# EAGLE board tx35-pnl (EAGLE 6.6.0)
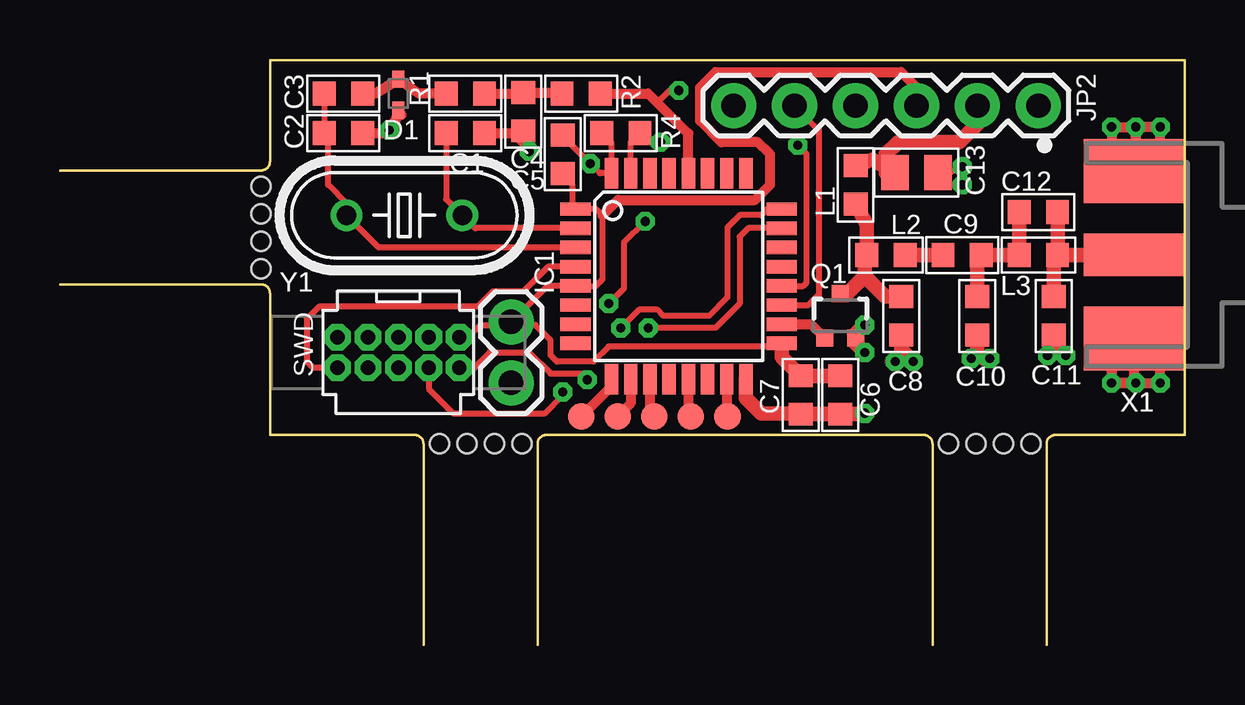
[diagram p0: board, top side]
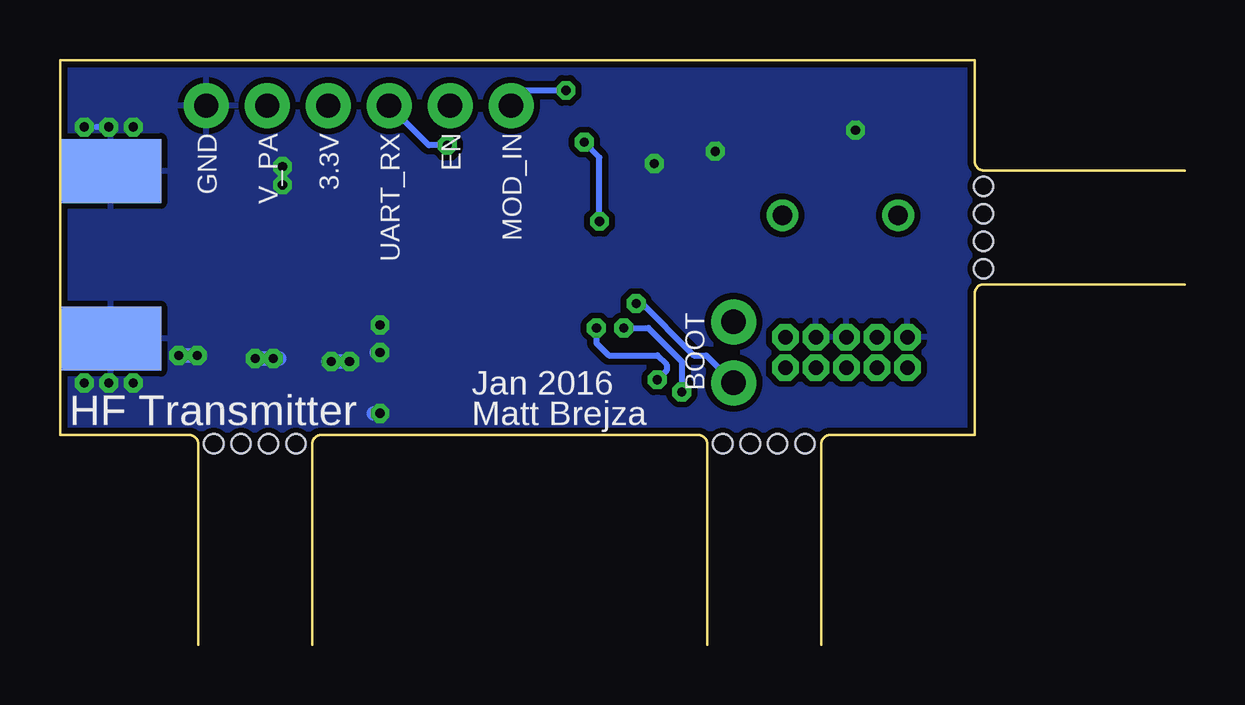
[diagram p1: board, bottom side, seen from below]

Size 46.86 x 24.38 mm. Coordinates in mm from the lower left corner, seen from the top.
Outline: 0,15.03 8.38,15.03 arc-90 8.75,14.65 8.75,8.75 14.77,8.75 arc-90 15.15,8.38 15.15,0
Outline: 0,19.78 8.38,19.78 arc90 8.75,20.15 8.75,24.38 46.86,24.38 46.86,8.75 41.48,8.75 arc90 41.11,8.38 41.11,0
Outline: 19.9,0 19.9,8.38 arc-90 20.27,8.75 35.98,8.75 arc-90 36.36,8.38 36.36,0
Copper layers (1*16): Top 0.035mm / dielectric 1.5mm / Bottom 0.035mm
Design rules "default *": minimum track width 10mil, minimum drill 14mil, track to track 8mil, track to pad 8mil, pad to pad 6mil, via to via 8mil, smd to smd 8mil, copper to edge 10mil, drill to drill 8mil, minimum pad ring 10mil, minimum via ring 8mil, stop-mask expansion 4mil, vias tented up to drill 16mil, thermal gap 10mil
Holes 0.8 mm at 8.38,19.11 8.38,17.96 8.38,16.82 8.38,15.68 15.82,8.38 16.96,8.38 18.1,8.38 19.25,8.38 37.03,8.38 38.17,8.38 39.31,8.38 40.46,8.38

## Footprints (pad centres in the part's own frame; a part is rotated, then mirrored left to right if it is on the bottom)
C0603-N = smd 0.95 x 1: 1 -0.8,0; 2 0.8,0
C0805-N = smd 1.15 x 1.45: 1 -0.9,0; 2 0.9,0
SOD523 = smd 0.7 x 0.5: A 0.7,0; C -0.6,0
TQFP32-08 = smd 1.27 x 0.559: 1 -4.293,2.8; 2 -4.293,2; 3 -4.293,1.2; 4 -4.293,0.4; 5 -4.293,-0.4; 6 -4.293,-1.2; 7 -4.293,-2; 8 -4.293,-2.8; 17 4.293,-2.8; 18 4.293,-2; 19 4.293,-1.2; 20 4.293,-0.4; 21 4.293,0.4; 22 4.293,1.2; 23 4.293,2; 24 4.293,2.8 | smd 0.559 x 1.27: 9 -2.8,-4.293; 10 -2,-4.293; 11 -1.2,-4.293; 12 -0.4,-4.293; 13 0.4,-4.293; 14 1.2,-4.293; 15 2,-4.293; 16 2.8,-4.293; 25 2.8,4.293; 26 2,4.293; 27 1.2,4.293; 28 0.4,4.293; 29 -0.4,4.293; 30 -1.2,4.293; 31 -2,4.293; 32 -2.8,4.293
SWD_PTH_SHROUD = drill 0.6 octagon: 1 -2.54,-0.635; 2 -2.54,0.635; 3 -1.27,-0.635; 4 -1.27,0.635; 5 0,-0.635; 6 0,0.635; 7 1.27,-0.635; 8 1.27,0.635; 9 2.54,-0.635; 10 2.54,0.635
1X02 = drill 1.016 pad 1.88: 1 0,0; 2 2.54,0
1X06 = drill 1.016 pad 1.88: 1 0,0; 2 2.54,0; 3 5.08,0; 4 7.62,0; 5 10.16,0; 6 12.7,0
L0603-N = smd 0.95 x 1: 1 -0.8,0; 2 0.8,0
SOT323 = smd 0.7 x 0.7: 1 -0.65,-0.925; 2 0.65,-0.925; 3 0,0.925
R0603-N = smd 0.95 x 1: 1 -0.8,0; 2 0.8,0
TP11R = smd 1.1 x 1.1: TP 0,0
J502-ND-142-0711-821/826 = smd 4.191 x 1.778: 1 2.115,0 | smd 4.191 x 2.667: G@1 2.115,3.495; G@2 2.115,-3.495 | smd 4.191 x 2.667 bottom: G@3 2.115,3.495; G@4 2.115,-3.495
HC49U-V = drill 0.813: 1 -2.413,0; 2 2.413,0

## Placement (x,y rotation side)
C1  18p  [C0603-N]  16.89,21.34 0 top
C2  12p  [C0603-N]  11.81,21.34 0 top
C3  12p  [C0603-N]  11.81,22.99 0 top
C4  560p  [C0603-N]  19.3,22.22 90 top
C5  100n  [C0603-N]  20.95,20.45 270 top
C6  4u7  [C0603-N]  32.51,10.41 90 top
C7  100n  [C0603-N]  30.86,10.41 90 top
C8  [C0603-N]  35.05,13.71 90 top
C9  [C0603-N]  37.59,16.25 180 top
C10  [C0603-N]  38.23,13.71 270 top
C11  [C0603-N]  41.4,13.71 270 top
C12  [C0603-N]  40.77,18.03 0 top
C13  [C0805-N]  35.69,19.68 0 top
D1  [SOD523]  14.1,22.99 270 top
IC1  STM32F030K6  [TQFP32-08]  25.78,15.37 0 top
J1  SWD_SHROUD  [SWD_PTH_SHROUD]  14.1,12.19 180 top
JP1  [1X02]  18.79,10.92 90 top
JP2  [1X06]  40.77,22.48 180 top
L1  [L0603-N]  33.15,19.18 90 top
L2  [L0603-N]  34.42,16.25 0 top
L3  [L0603-N]  40.77,16.25 0 top
Q1  MOSFET-NCHANNEL2N7002PW  [SOT323]  32.51,13.71 0 top
R1  2.2M  [R0603-N]  16.89,22.99 180 top
R2  220k  [R0603-N]  21.72,22.99 180 top
R4  10k  [R0603-N]  23.37,21.34 180 top
TP1  PTR1TP11R  [TP11R]  27.81,9.52 0 top
TP2  PTR1TP11R  [TP11R]  21.72,9.52 0 top
TP3  PTR1TP11R  [TP11R]  26.29,9.52 0 top
TP5  PTR1TP11R  [TP11R]  24.76,9.52 0 top
TP6  PTR1TP11R  [TP11R]  23.24,9.52 0 top
X1  SMA-142-0711-821/826  [J502-ND-142-0711-821/826]  46.86,16.25 180 top
Y1  [HC49U-V]  14.35,17.91 0 top

## Library data of the parts
C1-C13 L1-L3 R1 R2 R4 = passives-7351
D1 = diode
IC1 JP1 = Mine
J1 = dtb
JP2 = SparkFun-Connectors; PROD_ID: CONN-08437
Q1 = SparkFun-DiscreteSemi; PROD_ID: TRANS-11151
TP1-TP3 TP5 TP6 = testpad
X1 = con-coax; MF: JOHNSON COMPONENTS; MPN: 142-0711-821; OC_FARNELL: 1019328; OC_NEWARK: 16F3627
Y1 = SparkFun-FreqCtrl

## Nets
+3V3: C5.2 C6.2 C7.2 IC1.1 IC1.5 IC1.17 J1.1 JP1.2 JP2.3
GND: C1.2 C2.2 C4.1 C5.1 C6.1 C7.1 C8.1 C10.2 C11.2 C13.2 D1.A IC1.16 IC1.32 J1.3 J1.5 J1.9 JP2.1 Q1.2 R4.2 X1.G@1 X1.G@2 X1.G@3 X1.G@4
MCO: IC1.18 Q1.1
N$1: C2.1 C3.1 IC1.3 Y1.1
N$2: C1.1 IC1.2 Y1.2
N$3: C3.2 D1.C R1.2
N$4: C4.2 R1.1 R2.2
N$5: IC1.28 JP2.6 R2.1
N$6: C11.1 C12.2 L3.2 X1.1
N$7: C13.1 JP2.2 L1.2
N$8: C9.1 C10.1 C12.1 L3.1
N$9: IC1.20 JP2.4
N$10: C9.2 L2.2
N$11: C8.2 L1.1 L2.1 Q1.3
N$12: IC1.19 JP2.5
N$13: IC1.31 JP1.1 R4.1
N$14: IC1.9 TP2.TP
N$15: IC1.15 TP1.TP
N$16: IC1.13 TP3.TP
N$18: IC1.11 TP5.TP
N$19: IC1.10 TP6.TP
NRST: IC1.4 J1.10
SWDCLK: IC1.24 J1.4
SWDIO: IC1.23 J1.2

## Tracks (layer width: path | path; a pad name or v marks a point on that pad's centre or on a via)
+3V3
  Top 0.254: C5.2 20.86,19.65 21.33,19.18 21.33,18.32 IC1.1 22.35,18.16 22.61,17.91 22.61,15.24 22.33,14.97 IC1.5 20.3,14.97 JP1.2 | IC1.17 29.84,12.57 29.72,12.45 22.86,12.45 22.22,11.81 20.7,11.81 20.45,12.06 20.45,12.7 19.81,13.33 18.92,13.33 JP1.2 | J1.1 17.02,12.83 17.52,13.33 18.67,13.33 JP1.2
  Top 0.406: 22.61,17.91 23.24,18.54 28.95,18.54 29.59,19.18 29.59,20.45 29.08,20.95 27.56,20.95 26.67,21.84 26.67,23.24 27.3,23.88 35.05,23.88 35.69,23.24 JP2.3
  Top 0.61: IC1.17 30.07,12 C7.2 C6.2
GND  (via drill 0.38)
  Top 0.254: D1.A 14.22,22.1 | 19.05,21.08 v19.56,20.57 19.3,20.83 C4.1 | C5.1 20.95,21.21 v22.1,20.07 22.5,19.66 IC1.32 22.98,20.92 R4.2 | X1.G@4 44.75,21.51 v44.83,21.59 | C13.2 37.08,19.68 v37.59,19.94 | v37.59,19.18 37.08,19.18 36.7,19.56
  Top 0.406: C2.2 13.84,21.34 v13.72,21.46 14.1,22.1 14.22,22.1 | C1.2 19.21,21.34 C4.1 | v43.81,10.92 v44.83,10.92 44.75,11 X1.G@1 43.81,11.83 v43.81,10.92 | v43.81,10.92 v45.85,10.92 45.85,11.94 44.07,11.94 43.81,11.68 v43.81,10.92 | 44.83,20.7 43.81,20.7 v43.81,21.59 v44.83,21.59 | 44.83,20.7 45.85,20.7 v45.85,21.59 v44.83,21.59 | v44.83,21.59 44.83,20.7
  Top 0.61: C10.2 38.23,12.06 38.1,12.06 v37.97,11.94 | v38.73,11.94 38.48,11.94 | C11.2 41.4,12.32 v41.15,12.06 | v41.91,12.06 41.78,12.06 | C8.1 35.05,12.32 v35.56,11.81 | v34.8,11.81 34.67,11.81 | v33.53,12.19 33.16,12.56 Q1.2 33.16,12.97 v33.53,13.33 | IC1.16 28.58,10.28 29.21,9.65 30.82,9.65 C7.1 C6.1 33.49,9.61 v33.53,9.65
  Bottom 0.254: v13.72,21.46 13.97,21.59 13.84,21.72 | v19.56,20.57 19.68,20.57 | v22.1,20.07 22.1,19.81 | v44.83,21.59 45.34,21.59 | v37.59,19.94 v37.59,19.18
  Bottom 0.61: 37.72,11.94 v37.97,11.94 v38.73,11.94 | 41.02,12.06 v41.15,12.06 v41.91,12.06 | 35.69,11.81 v35.56,11.81 v34.8,11.81 | v33.53,12.19 33.65,12.19 | v33.53,9.65 33.78,9.65
  pour Bottom (isolate 0.254): 8.64,25.02 48.26,25.02 48.51,24.76 48.51,8.38 48.13,8 8.51,8 8.13,8.38 8.13,24.38 8.25,24.51
MCO
  Top 0.406: IC1.18 31.29,13.37 Q1.1
N$1
  Top 0.254: IC1.3 13.28,16.57 Y1.1 11.94,18.41 11.18,19.18 11.18,20.92 C2.1 C3.1
N$2
  Top 0.254: IC1.2 17.3,17.37 Y1.2 16.09,18.58 C1.1
N$3
  Top 0.406: R1.2 14.95,22.99 D1.C 13.12,22.99 C3.2
N$4
  Top 0.406: R1.1 19.27,22.99 C4.2 20.88,23.02 R2.2
N$5  (via drill 0.38)
  Top 0.254: v25.78,23.11 25.4,23.11 24.89,22.61
  Top 0.406: R2.1 24.51,22.99 24.89,22.61 26.18,21.32 IC1.28
  Bottom 0.254: JP2.6 28.07,22.73 27.68,23.11 v25.78,23.11
N$6
  Top 0.61: C12.2 L3.2 | X1.1 L3.2 | C11.1 41.4,16.09 L3.2
N$7
  Top 0.61: L1.2 33.86,20.23 C13.1 34.42,19.7 34.42,20.45 34.92,20.95 37.46,20.95 38.23,21.72 JP2.2
N$8
  Top 0.61: C12.1 L3.1 C9.1 38.23,16.09 C10.1
N$9  (via drill 0.38)
  Top 0.254: IC1.20 30.97,14.97 31.11,15.11 31.11,20.45 v30.73,20.83
  Bottom 0.254: v30.73,20.83 31.49,20.83 JP2.4
N$10
  Top 0.61: L2.2 C9.2
N$11
  Top 0.61: C8.2 34.38,14.52 33.53,15.37 | 33.53,15.37 33.53,16.17 L2.1 33.62,17.53 L1.1 | Q1.3 32.8,14.64 33.53,15.37
N$12
  Top 0.254: IC1.19 31.18,14.17 31.62,14.6 31.62,21.46 JP2.5
N$13  (via drill 0.38)
  Top 0.254: IC1.31 23.78,20.95 R4.1 24.55,20.95 v25.02,20.95 | v22.86,14.22 23.49,14.86 23.49,16.76 v24.38,17.65
  Bottom 0.254: v22.86,14.22 22.73,14.35 20.45,12.06 19.94,12.06 JP1.1 | v24.38,17.65 24.38,20.32 v25.02,20.95
N$14
  Top 0.406: IC1.9 22.98,10.79 TP2.TP
N$15
  Top 0.406: IC1.15 27.78,9.56 TP1.TP
N$16
  Top 0.406: IC1.13 26.18,9.63 TP3.TP
N$18
  Top 0.406: IC1.11 24.58,9.71 TP5.TP
N$19
  Top 0.406: IC1.10 23.78,10.06 TP6.TP
NRST
  Top 0.254: IC1.4 20.34,15.77 19.3,14.73 18.03,14.73 17.4,14.1 10.79,14.1 10.29,13.59 10.29,11.81 10.54,11.56 J1.10
SWDCLK  (via drill 0.38)
  Top 0.254: 24,13.84 v23.37,13.21 24.13,13.97 24.89,13.97 25.14,13.71 27.05,13.71 27.81,14.48 27.81,17.4 28.32,17.91 29.21,17.91 29.47,18.17 IC1.24 | v20.95,10.54 20.95,10.41 20.19,9.65 16.38,9.65 15.37,10.67 J1.4
  Bottom 0.254: v23.37,13.21 22.35,13.21 20.95,11.81 v20.95,10.54
SWDIO  (via drill 0.38)
  Top 0.254: 24.64,13.33 v24.51,13.21 | 24.38,13.08 v24.51,13.21 | J1.2 17.27,11.56 17.91,12.19 19.56,12.19 20.45,11.3 21.72,11.3 v21.97,11.05 | v24.51,13.21 27.3,13.21 28.32,14.22 28.32,17.02 28.67,17.37 IC1.23
  Bottom 0.254: v24.51,13.21 24.51,12.57 24,12.06 21.97,12.06 21.59,11.68 21.59,11.43 v21.97,11.05

## Text on the board
tPlace: SWD
bPlace: MOD_IN | EN | UART_RX | 3.3V | V_PA | GND | BOOT | Jan 2016 | Matt Brejza | HF Transmitter
_tNames: R2 | JP2 | C3 | R1 | R4 | D1 | C2 | C4 | C5 | C1 | C13 | C12 | L1 | L2 | C9 | Y1 | Q1 | IC1 | L3 | C8 | C10 | C11 | X1 | C7 | C6